# Altium PCB PCB_电机驱动板.pcbdoc
Units mil, origin at the board's own origin, x right, y up, seen from the top; angles counter-clockwise.
Board outline 6379.73 x 4315 mil, 2 copper layers (Top Layer, Bottom Layer); 62 components, 45 nets, 159 pads, 284 vias.
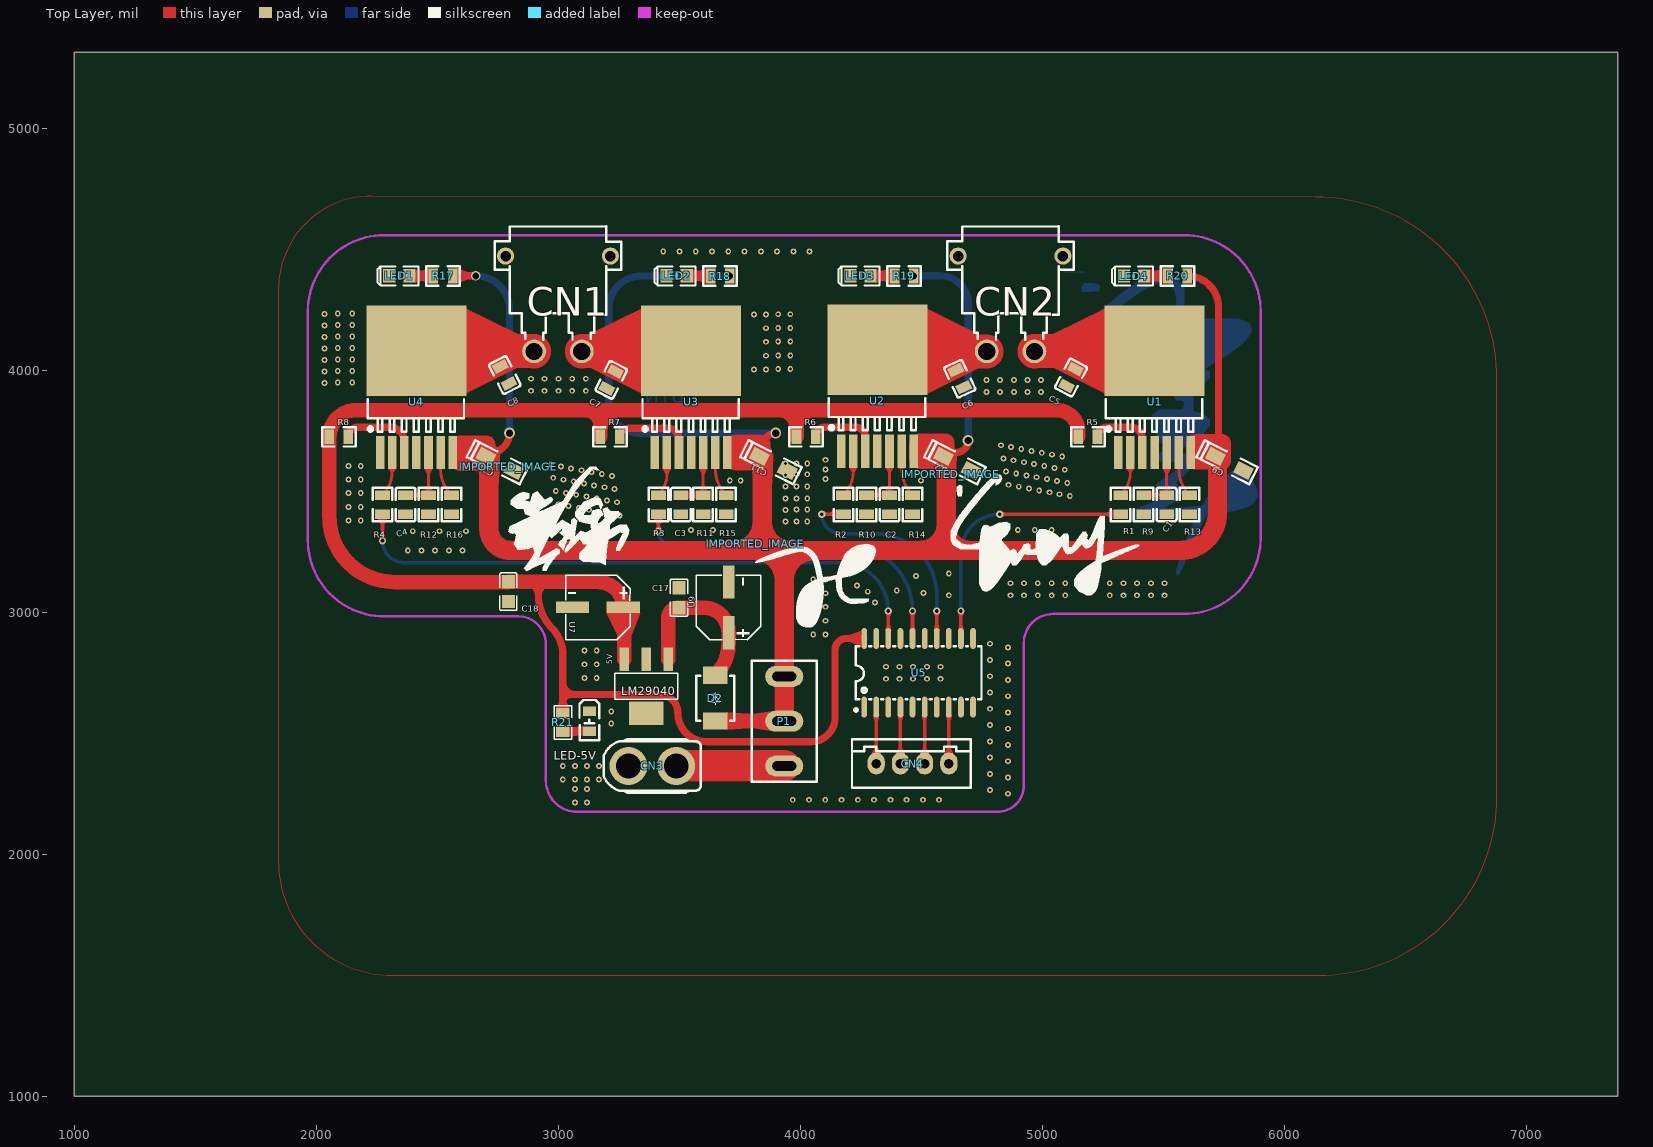
[diagram p0: Top Layer view]
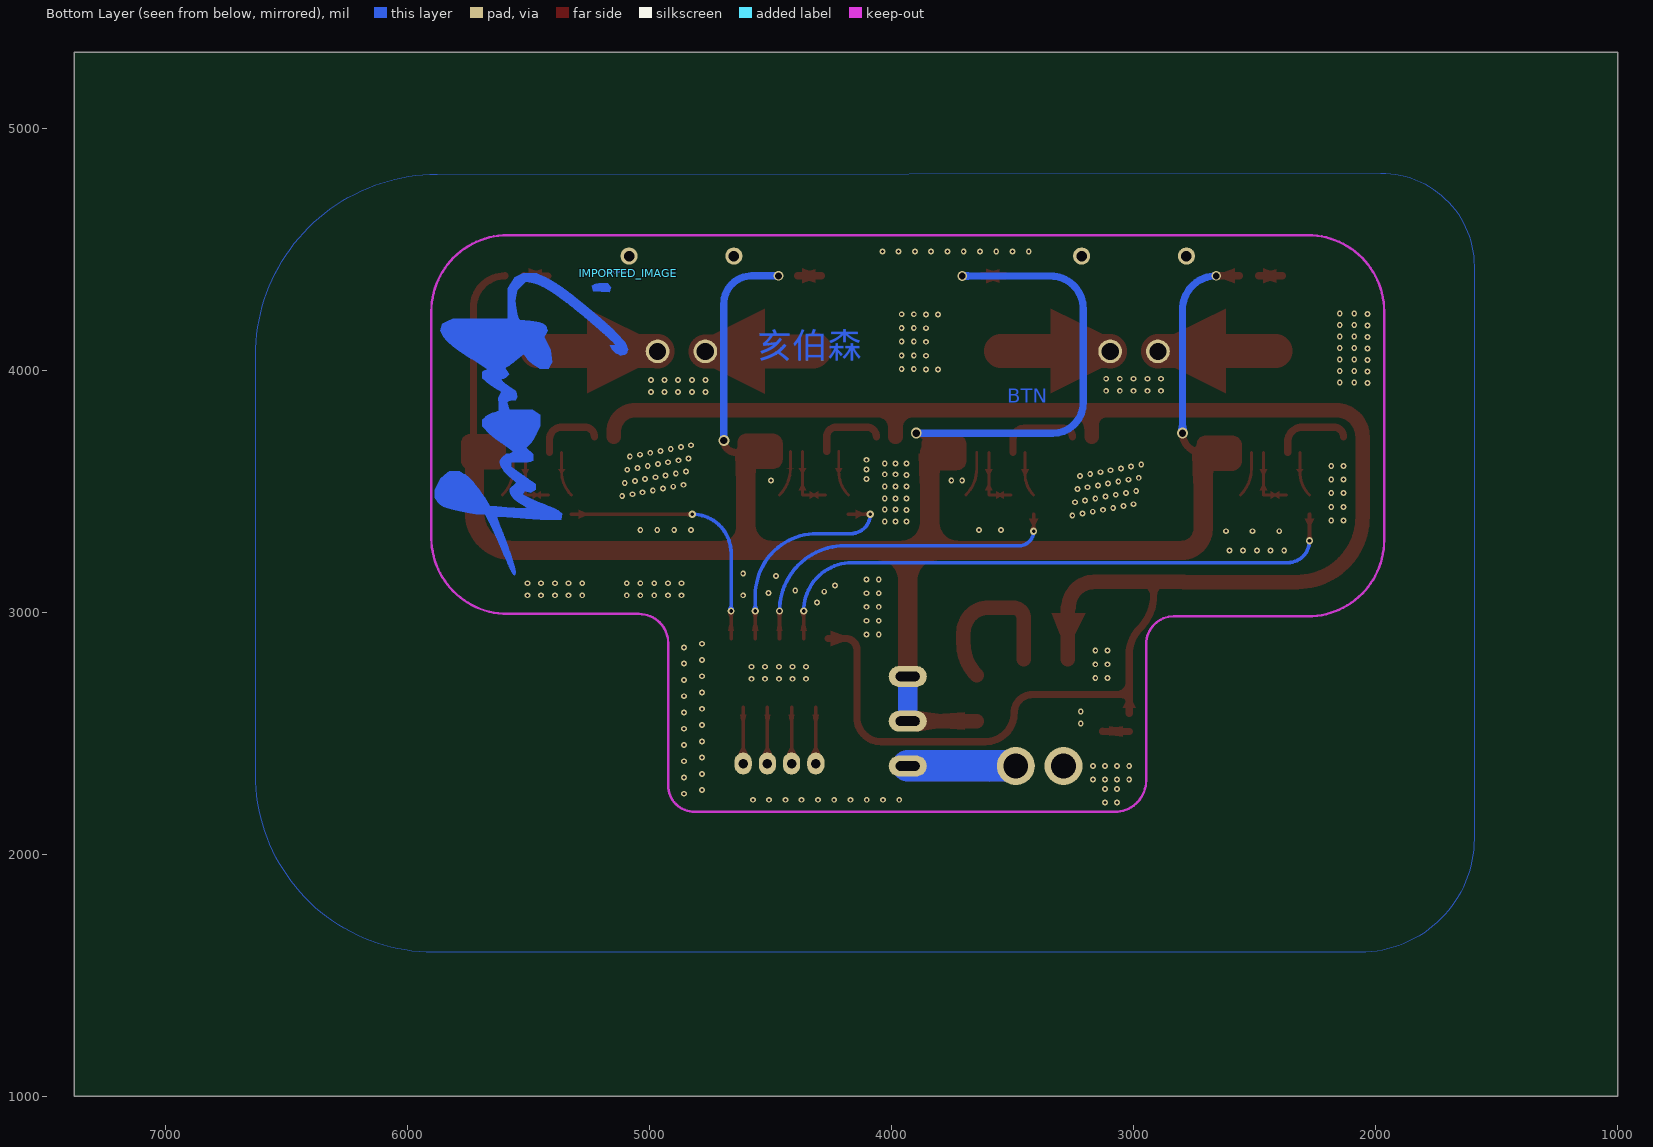
[diagram p1: Bottom Layer view, seen from below]

## Layer stack, top to bottom
Top Layer: signal copper (thickness not stored)
Dielectric: dielectric 12.6, FR-4, Dk 4.8
Bottom Layer: signal copper (thickness not stored)

## Board outline
7379.73,1000 1000,1000 1000,5315 7379.73,5315

## Components (designator, comment, footprint, x,y, rotation, side; value= is the part's Value field where it differs from the comment)
C1 "100PF" C0805#1 5514.73,3445 r90 top
C2 "100PF" C0805#1 4369.73,3445 r90 top
C3 "100PF" C0805#1 3507.42,3445 r90 top
C4 "100PF" C0805#1 2369.72,3445 r90 top
C5 "100PF" C0805#1 5119.73,3970 r62 top
C6 "100PF" C0805#1 4659.73,3965 r115 top
C7 "100PF" C0805#1 3219.72,3960 r63 top
C8 "100PF" C0805#1 2779.72,3980 r117 top
C9 "1u" CASE-A_3216 5774.73,3615 r153 top
C10 "1u" CASE-A_3216 2759.72,3615 r153 top
C11 "1u" CASE-A_3216 3889.72,3615 r153 top
C12 "1u" CASE-A_3216 4649.73,3615 r153 top
C17 "100uF" C0805#2 3499.72,3060 r270 top
C18 "100uF" C0805#2 2794.72,3085 r90 top
CN1 "XT30PW-M" CONN-TH_XT30PW-M 2999.72,4275 r180 top
CN2 "XT30PW-M" CONN-TH_XT30PW-M 4869.73,4275 r180 top
CN3 "Changzhou" CONN-TH_XT30UPB-F 3389.72,2365 r180 top
CN4 "XH2.54-4A" XH2.54-4A 4464.73,2375 r180 top
D2 "SS54" SMB_L4.6-W3.6-LS5.3-R-RD 3649.72,2645 r270 top
IMPORTED_IMAGE "IMPORTED_IMAGE" IMPORTED_IMAGE#1 4622.15,3570.84 r0 top
IMPORTED_IMAGE "IMPORTED_IMAGE" IMPORTED_IMAGE#1 3815.66,3282.69 r0 top
IMPORTED_IMAGE "IMPORTED_IMAGE" IMPORTED_IMAGE#1 2793.4,3601.25 r0 top
IMPORTED_IMAGE "IMPORTED_IMAGE" IMPORTED_IMAGE#2 5089.39,4401.13 r0 bottom
LED1 "LED-0805_G" LED0805_GREEN 2344.72,4390 r180 top
LED2 "LED-0805_G" LED0805_GREEN 3489.72,4390 r180 top
LED3 "LED-0805_G" LED0805_GREEN 4249.73,4390 r180 top
LED4 "LED-0805_G" LED0805_GREEN 5379.73,4389.21 r180 top
LED-5V "E6C0805UR" LED0805-R-RD 3129.72,2550 r270 top
LM29040 "LM2940IMP-5.0" SOT-223-4_L6.5-W3.5-P2.30-LS7.0-BR 3364.72,2695 r90 top
P1 "钮子开关" "钮子开关 MTS-102" 3934.72,2550 r270 top
R1 "1k" R0805#1 5324.73,3445 r90 top
R2 "1k" R0805#1 4179.73,3445 r90 top
R3 "1k" R0805#1 3414.72,3445 r90 top
R4 "1k" R0805#1 2274.72,3445 r90 top
R5 "1k" R0805#1 5189.73,3725 r0 top
R6 "1k" R0805#1 4024.72,3725 r0 top
R7 "1k" R0805#1 3214.72,3725 r0 top
R8 "1k" R0805#1 2094.72,3725 r0 top
R9 "1k" R0805#1 5419.73,3445 r90 top
R10 "1k" R0805#1 4274.73,3445 r90 top
R11 "1k" R0805#1 3599.72,3445 r90 top
R12 "1k" R0805#1 2464.72,3445 r90 top
R13 "1k" R0805#1 5609.73,3445 r90 top
R14 "1k" R0805#1 4464.73,3445 r90 top
R15 "1k" R0805#1 3694.72,3445 r90 top
R16 "1k" R0805#1 2559.72,3445 r90 top
R17 "330" R0805#1 2524.72,4390 r0 top
R18 "330" R0805#1 3669.72,4389.21 r0 top
R19 "330" R0805#1 4429.73,4390 r0 top
R20 "330" R0805#1 5559.73,4390 r0 top
R21 "4.7k" R0805#2 3019.72,2545 r270 top
U1 "BTN8962TAAUMA1" TO-263-7_L10.2-W10.4-P1.27-LS14.4-B 5464.73,3870 r270 top
U2 "BTN8962TAAUMA1" TO-263-7_L10.2-W10.4-P1.27-LS14.4-B 4319.73,3875 r270 top
U3 "BTN8962TAAUMA1" TO-263-7_L10.2-W10.4-P1.27-LS14.4-B 3549.72,3870 r270 top
U4 "BTN8962TAAUMA1" TO-263-7_L10.2-W10.4-P1.27-LS14.4-B 2414.72,3870 r270 top
U5 "SN74ALS244CNSR" SOIC-20_L13.3-W5.5-P1.27-LS7.8-BL 4489.73,2750 r0 top
U7 "220uf16V" CAP-SMD_BD6.3-L6.6-W6.6-LS7.6-FD 3164.72,3020 r180 top
U9 "100uf25V" CAP-SMD_BD6.3-L6.6-W6.6-LS7.6-FD 3704.72,3020 r90 top
? "" ? 2459.72,2942.45 r0 top
? "" ? 5414.73,3032.55 r0 top
? "" ? 6027.44,3772.5 r0 top
? "" ? 2720.86,3367.5 r0 top

## Footprints (in the part's own frame and the unit in brackets; to place one, negate y for a bottom-side part, rotate by r counter-clockwise, add the part's x,y. Pads: shape width x height; smd on the part's side, far side on the other; paste and mask are expansions set on the pad)
C0805#1 [mm]
  rect 1x1.55 smd paste+0 mask+0.102: 1(-1,0) 2(1,0)
  silkscreen extent -1.75,-1.04 1.75,1.04
C0805#2 [mm]
  rect 1.41x1.35 smd paste-100 mask+0.051: 1(-1.03,0) 2(1.03,0)
  silkscreen extent -1.96,-0.9 1.96,0.9
CAP-SMD_BD6.3-L6.6-W6.6-LS7.6-FD [mm]
  rect 3.5x1.2 smd paste+0 mask+0.051: 1(-2.67,0) 2(2.67,0)
  silkscreen extent -3.38,-3.38 3.38,3.38
CASE-A_3216 [mil]
  rect 71.5x53.5 smd paste+0 mask+2: 1(64.5,0) 2(-64.5,0)
  silkscreen extent -112,-39 135,40
CONN-TH_XT30PW-M [mm]
  round 2.5 hole 1.8 paste+0 mask+0.051: 1(-2.5,5) 2(2.5,5)
  round 1.8 hole 1.1 paste+0 mask+0.051: 3(5.5,-5) 4(-5.5,-5)
  silkscreen extent -6.65,-8.15 6.65,3.81
CONN-TH_XT30UPB-F [mm]
  round 4 hole 2.6 paste+0 mask+0.051: 1(-2.5,0) 2(2.5,0)
  silkscreen extent -5.1,-2.8 5.1,2.8
IMPORTED_IMAGE#1 [mil]
  silkscreen extent 0,-500 780,0
IMPORTED_IMAGE#2 [mil]
  Top Layer region: 1991 vertices and 7 holes, not listed, extent 0,0 799.66,1247.76
  Top Layer region: 77.13,78.21 73.55,68.88 69.97,59.55 84.71,41.79 109.35,41.88 109.99,41.89 110.63,41.89 111.26,41.9 111.9,41.92 112.54,41.93 113.83,41.98 115.11,42.03 116.38,42.1 117.66,42.18 118.93,42.27 120.18,42.37 121.43,42.48 122.66,42.61 123.88,42.74 125.08,42.88 126.26,43.03 127.42,43.19 128.56,43.36 129.67,43.53 130.76,43.72 131.81,43.91 132.83,44.11 133.82,44.32 134.77,44.53 135.68,44.75 136.55,44.97 137.38,45.2 138.17,45.44 138.91,45.68 139.6,45.92 140.24,46.17 140.82,46.43 141.1,46.56 141.35,46.68 141.6,46.81 141.83,46.94 142.04,47.07 150.09,52.18 145.82,74.63 111.48,76.42
LED0805-R-RD [mm]
  rect 1x1.4 smd paste+0 mask+0.051: 1(1.05,0) 2(-1.05,0)
  silkscreen extent -2.22,-1.04 1.99,1.01
LED0805_GREEN [mil]
  rect 51.2x55.1 smd paste+0 mask+2: 1(-41.35,0) 2(41.35,0)
  silkscreen extent -79,-39 91,39
R0805#1 [mm]
  rect 1x1.55 smd paste+0 mask+0.102: 1(-1,0) 2(1,0)
  silkscreen extent -1.75,-1.02 1.75,1.02
R0805#2 [mm]
  rect 1.133x1.377 smd paste-100 mask+0.051: 1(-0.966,0) 2(0.966,0)
  silkscreen extent -1.76,-0.92 1.76,0.92
SMB_L4.6-W3.6-LS5.3-R-RD [mm]
  rect 1.8x2.54 smd paste+0 mask+0.051: 1(2.4,0) 2(-2.4,0)
  silkscreen extent -2.35,-2 2.35,2
SOIC-20_L13.3-W5.5-P1.27-LS7.8-BL [mm]
  oval 0.6x2.2 smd paste+0 mask+0.051: 1(-5.715,-3.6) 2(-4.445,-3.6) 3(-3.175,-3.6) 4(-1.905,-3.6) 5(-0.635,-3.6) 6(0.635,-3.6) 7(1.905,-3.6) 8(3.175,-3.6) 9(4.445,-3.6) 10(5.715,-3.6) 11(5.715,3.6) 12(4.445,3.6) 13(3.175,3.6) 14(1.905,3.6) 15(0.635,3.6) 16(-0.635,3.6) 17(-1.905,3.6) 18(-3.175,3.6) 19(-4.445,3.6) 20(-5.715,3.6)
  silkscreen extent -6.72,-4.05 6.6,2.79
SOT-223-4_L6.5-W3.5-P2.30-LS7.0-BR [mm]
  rect 2.47x0.98 smd paste+0 mask+0.051: 1(2.835,-2.3) 2(2.835,0) 3(2.835,2.3)
  rect 2.47x3.6 smd paste+0 mask+0.051: 4(-2.835,0)
  silkscreen extent -1.37,-3.33 1.37,3.33
TO-263-7_L10.2-W10.4-P1.27-LS14.4-B [mm]
  rect 3.5x0.9 smd paste+0 mask+0.102: 1(5.334,-3.81) 2(5.334,-2.54) 3(5.334,-1.27) 4(5.334,0) 5(5.334,1.27) 6(5.334,2.54) 7(5.334,3.81)
  rect 9.5x10.5 smd paste+0 mask+0.102: 8(-5.334,0)
  silkscreen extent -0.27,-5.1 3.13,5
XH2.54-4A [mm]
  oval 1.8x2.3 hole 1 paste+0 mask+0.102: 1(3.81,0) 2(1.27,0) 3(-1.27,0) 4(-3.81,0)
  silkscreen extent -6.1,-2.54 6.35,2.54
"钮子开关 MTS-102" [mm]
  oval 2.2x4 hole 1 slot 2.5 at 90 deg paste+0 mask+0.102: 1(-4.7,0) 2(0,0) 3(4.7,0)
  silkscreen extent -6.35,-3.43 6.35,3.43
? [mil]

## Via types
v1: diameter 24.1, hole 12, Top Layer to Bottom Layer, tented both sides, 270 vias
v2: diameter 30, hole 15, Top Layer to Bottom Layer, tented both sides, 8 vias
v3: diameter 45, hole 30, Top Layer to Bottom Layer, tented both sides, 3 vias
v4: diameter 40, hole 28, Top Layer to Bottom Layer, tented both sides, 3 vias

## Nets (pads, with @x,y where several pads share a name; then routed paths per layer and width w, separated by ;. In a path a pad name is that pad's centre, name@x,y a point inside that pad or via, vN(x,y) a via of type N, cw(c..) or ccw(c..) an arc to the next point about the centre after c; other vN are vias at no path point)
5V: C18.2 LM29040.3 R5.1 R6.1 R7.1 R8.1 R21.1 U5.20 U7.1 | length 8397.2
  Top Layer w30: 2854.2,3125.55 2862.78,3125.55 cw(c2862.78,3069.18) 2919.14,3069.18 ; 2919.14,3125.55 2919.14,3069.18 ; 2994.72,3125.55 2975.51,3125.55 ccw(c2975.51,3069.18) 2919.14,3069.18 ; R21.1 3019.72,2630 ; 4191.43,2891.7 U5.20 ; 4191.45,2891.73 ccw(c4191.45,2845) 4144.73,2845 4144.73,2771.73 4144.73,2670 4144.73,2565 cw(c4044.72,2565) 4044.72,2465 3614.72,2465 cw(c3614.72,2585) 3494.72,2585 ccw(c3419.72,2585) 3419.72,2660 3069.72,2660 ; 2919.14,3069.18 ccw(c3108.91,3069.18) 2974.73,2935 cw(c2866.09,2826.36) 3019.72,2826.36 3019.72,2783.58 3019.72,2710 ; 3019.72,2630 3019.72,2710 ; 3019.72,2630 cw(c3049.72,2630) 3049.72,2660 3069.72,2660 ; 3019.72,2710 ccw(c3069.72,2710) 3069.72,2660
  Top Layer w60: 2055.32,3394.4 R8.1@2055.32,3725 ; 2055.36,3394.37 ccw(c2324.72,3394.37) 2324.72,3125 2794.22,3125 ccw(c2794.18,3125.55) C18.2 ; R8.1 cw(c2165.35,3725) 2165.35,3835 2304.72,3835 5059.73,3835 cw(c5059.73,3744.37) 5150.36,3744.37 R5.1 ; C18.2@2794.72,3125.5 3164.32,3125.5 ; 3113.25,3835 cw(c3113.25,3772.9) 3175.36,3772.9 ; 3164.3,3125.55 cw(c3164.3,3020) U7.1 cw(c3269.84,3015.67) U7.1@3274.17,3015.67 ; 3175.32,3755.8 3175.32,3725 3175.32,3772.9 ; 3175.36,3755.77 cw(c3254.58,3755.77) 3254.58,3835 ; LM29040.3 U7.1@3274.22,3015.7 ; 3914.58,3835 cw(c3914.58,3764.23) 3985.36,3764.23 ; 3985.32,3761.8 3985.32,3725 3985.32,3764.2 ; 3985.36,3761.77 cw(c4058.58,3761.77) 4058.58,3835
BAT1: CN3.1 P1.3 | length 893.1
  Top Layer w130: CN3.1 ccw(c3488.18,2365) CN3.1@3488.18,2364.96 ; CN3.1@3488.22,2365 P1.3
  Bottom Layer w130: CN3.1 ccw(c3488.18,2365) CN3.1@3488.18,2364.96 ; CN3.1@3488.22,2365 P1.3
C1_2: C1.2 R9.2 U1.5 | length 270.6
  Top Layer w12: R9.2 C1.2 U1.5
C2_2: C2.2 R10.2 U2.5 | length 275.6
  Top Layer w12: R10.2 C2.2 U2.5
C3_2: C3.2 R11.2 U3.5 | length 267.9
  Top Layer w12: C3.2 R11.2 U3.5
C4_2: C4.2 R12.2 U4.5 | length 270.6
  Top Layer w12: C4.2 R12.2 U4.5
GND: C1.1 C2.1 C3.1 C4.1 C5.1 C6.1 C7.1 C8.1 C9.2 C10.2 C11.2 C12.2 C17.1 C18.1 CN3.2 LED1.2 LED2.2 LED3.2 LED4.2 LED-5V.2 LM29040.2 LM29040.4 R9.1 R10.1 R11.1 R12.1 R13.1 R14.1 R15.1 R16.1 U1.1 U2.1 U3.1 U4.1 U5.1 U5.3 U5.5 U5.7 U5.9 U5.10 U5.11 U5.13 U5.15 U5.17 U5.19 U7.2 U9.2
  other v1: 3069.72,2213.75 3119.72,2213.75 3969.72,2225 4036.95,2225 4104.16,2225 4171.4,2225 4238.61,2225 4305.84,2225 4373.06,2225 4440.28,2225 4507.51,2225 4574.73,2225 4859.73,2250 4784.73,2265 3069.72,2270 3119.72,2270 3019.72,2308.75 3069.72,2308.75 3119.72,2308.75 3169.72,2308.75 4859.73,2317.22 4784.73,2332.22 3019.72,2365 3069.72,2365 3119.72,2365 3169.72,2365 4859.73,2384.44 4784.73,2399.44 4859.73,2451.67 4784.73,2466.67 4859.73,2518.89 4784.73,2533.89 3219.72,2540 4859.73,2586.11 3219.72,2590 4784.73,2601.11 4859.73,2653.33 4784.73,2668.33 4859.73,2720.56 4354.73,2725 4410.98,2725 4467.23,2725 4524.73,2725 4580.98,2725 3109.72,2728.75 3159.72,2728.75 4784.73,2735.56 4354.73,2775 4410.98,2775 4467.23,2775 4524.73,2775 4580.98,2775 3109.72,2785 3159.72,2785 4859.73,2787.78 4784.73,2802.78 3109.72,2842.5 3159.72,2842.5 4859.73,2855 4784.73,2870 4054.72,2908.75 4104.73,2908.75 4054.72,2965 4104.73,2965 4054.72,3022.5 4104.73,3022.5 4309.73,3040 4614.73,3070 4869.73,3070 4925.98,3070 4982.23,3070 5039.73,3070 5095.98,3070 5279.73,3070 5335.98,3070 5392.23,3070 5449.73,3070 5505.98,3070 4054.72,3078.75 4104.73,3078.75 4509.73,3080 4279.73,3085 4399.73,3090 4234.73,3110 4869.73,3120 4925.98,3120 4982.23,3120 5039.73,3120 5095.98,3120 5279.73,3120 5335.98,3120 5392.23,3120 5449.73,3120 5505.98,3120 4054.72,3135 4104.73,3135 4479.73,3150 4614.73,3160 2379.36,3255 2435.61,3255 2491.86,3255 2549.36,3255 2605.61,3255 2399.72,3335 2509.72,3335 2619.72,3335 3549.72,3340 3639.72,3340 4829.73,3340 4899.73,3340 4969.73,3340 5039.73,3340 3939.72,3375 3984.72,3375 4029.72,3375 2134.72,3378.75 2184.72,3378.75 3254.72,3400 3212.51,3407.78 3170.28,3415.56 3939.72,3422.5 3128.05,3423.33 3984.72,3425 4029.72,3425 3085.84,3431.11 2134.72,3435 2184.72,3435 3043.61,3438.89 3001.39,3446.67 3244.16,3454.44 3201.95,3462.22 3159.72,3470 3939.72,3470 3984.72,3470 4029.72,3470 3117.51,3477.78 5114.73,3480.01 3075.28,3485.56 5072.51,3487.79 2134.72,3492.5 2184.72,3492.5 3033.05,3493.33 5030.28,3495.57 2990.84,3501.11 4988.06,3503.34 3233.61,3508.89 4945.84,3511.12 3191.39,3516.67 4903.61,3518.9 3939.72,3520 3984.72,3520 4029.72,3520 3149.16,3524.44 4861.4,3526.68 3106.95,3532.22 5104.16,3534.45 3064.72,3540 5061.94,3542.23 3709.72,3545 3754.72,3545 4499.73,3545 3022.51,3547.78 2134.72,3548.75 2184.72,3548.75 4104.73,3550 5019.73,3550.01 2980.28,3555.56 4977.51,3557.79 3223.05,3563.33 4935.28,3565.57 3939.72,3567.5 3984.72,3570 4029.72,3570 3180.84,3571.11 4893.06,3573.34 3138.61,3578.89 4850.84,3581.12 3096.39,3586.67 5093.61,3588.9 4104.73,3590 3054.16,3594.44 5051.4,3596.68 3011.95,3602.22 5009.16,3604.45 2134.72,3605 2184.72,3605 2969.72,3610 4966.94,3612.23 3939.72,3615 3984.72,3615 4029.72,3615 4924.73,3620.01 4882.51,3627.79 4104.73,3630 4840.28,3635.57 5083.06,3643.34 5040.84,3651.12 4998.61,3658.9 4956.4,3666.68 4914.16,3674.45 4871.94,3682.23 4829.73,3690.01 4769.73,3910 4825.98,3910 4883.48,3910 4939.73,3910 4995.98,3910 2888.47,3915 2944.72,3915 3002.22,3915 3058.47,3915 3114.72,3915 2034.72,3947.5 2089.72,3950 2149.72,3950 4769.73,3960 4825.98,3960 4883.48,3960 4939.73,3960 4995.98,3960 2888.47,3965 2944.72,3965 3002.22,3965 3058.47,3965 3114.72,3965 2034.72,3995 2089.72,3997.5 2149.72,3997.5 3809.72,4003.75 3859.72,4003.75 3909.72,4005 3959.72,4005 2034.72,4042.5 2089.72,4045 2149.72,4045 3859.72,4060 3909.72,4061.25 3959.72,4061.25 2034.72,4090 2089.72,4092.5 2149.72,4092.5 3859.72,4117.5 3909.72,4118.75 3959.72,4118.75 2034.72,4137.5 2089.72,4140 2149.72,4140 3859.72,4173.75 3909.72,4175 3959.72,4175 2034.72,4185 2089.72,4187.5 2149.72,4187.5 3809.72,4230 3859.72,4230 3909.72,4231.25 3959.72,4231.25 2034.72,4232.5 2089.72,4235 2149.72,4235 3434.72,4490 3501.95,4490 3569.16,4490 3636.39,4490 3703.61,4490 3770.84,4490 3838.05,4490 3905.28,4490 3972.51,4490 4039.72,4490
M1A: C5.2 CN2.1 U1.8 | length 497.6
  Top Layer w140: CN2.1@4968.14,4078.15 cw(c4969.99,4078.15) 4969.99,4080 U1.8
M1B: C6.2 CN2.2 U2.8 | length 455.5
  Top Layer w140: U2.8 ccw(c4326.57,4085) U2.8@4326.57,4078.15 ; U2.8@4326.62,4078.1 CN2.2@4771.32,4078.1
M2A: C7.2 CN1.1 U3.8 | length 452.6
  Top Layer w140: CN1.1@3098.14,4078.15 cw(c3099.99,4078.15) 3099.99,4080 U3.8
M2B: C8.2 CN1.2 U4.8 | length 487.6
  Top Layer w140: U4.8 CN1.2@2899.43,4080 ; CN1.2@2899.44,4080 cw(c2899.44,4078.15) CN1.2
PWMIN1: CN4.1 U5.2 | length 233.3
  Top Layer w15: CN4.1 U5.2
PWMIN2: CN4.2 U5.4 | length 233.3
  Top Layer w15: CN4.2 U5.4
PWMIN3: CN4.3 U5.6 | length 233.3
  Top Layer w15: CN4.3 U5.6
PWMIN4: CN4.4 U5.8 | length 233.3
  Top Layer w15: CN4.4 U5.8
PWMOUT1: R4.1 U5.18 | length 2479.4
  Top Layer w15: v2(2274.72,3295) R4.1 ; U5.18 v2(4364.73,3005)
  Bottom Layer w15: v2(2274.72,3295) ccw(c2364.72,3295) 2364.72,3205 2379.35,3205 2435.6,3205 2491.85,3205 2549.35,3205 2605.6,3205 3569.72,3205 4164.73,3205 cw(c4164.73,3005) v2(4364.73,3005)
PWMOUT2: R3.1 U5.16 | length 1422.3
  Top Layer w15: v2(3414.72,3335) R3.1 ; U5.16 v2(4464.73,3005)
  Bottom Layer w15: v2(3414.72,3335) ccw(c3474.72,3335) 3474.72,3275 3744.72,3275 4194.73,3275 cw(c4194.73,3005) v2(4464.73,3005)
PWMOUT3: R2.1 U5.14 | length 934.9
  Top Layer w15: v2(4089.72,3405) cw(c4090.36,3405) v2@4090.36,3405.63 ; v2@4090.32,3405.6 R2.1 ; U5.14 v2(4564.73,3005)
  Bottom Layer w15: v2(4089.72,3405) ccw(c4169.73,3405) 4169.73,3325 4309.73,3325 cw(c4309.73,3070) 4564.73,3070 v2(4564.73,3005)
PWMOUT4: R1.1 U5.12 | length 1105
  Top Layer w15: U5.12 v2(4664.73,3005) ; v2(4824.73,3405) 5324.12,3405 ccw(c5324.09,3405.63) R1.1
  Bottom Layer w15: v2(4664.73,3005) 4664.73,3245 cw(c4824.73,3245) v2(4824.73,3405)
R1_2: R1.2 U1.2 | length 186.4
  Top Layer w12: R1.2 ccw(c5228.15,3580.95) 5364.72,3580.95 ; 5364.73,3580.9 U1.2
R2_2: R2.2 U2.2 | length 191.4
  Top Layer w12: R2.2 ccw(c4083.14,3580.95) 4219.73,3580.95 ; 4219.73,3580.9 U2.2
R3_2: R3.2 U3.2 | length 185
  Top Layer w12: R3.2 ccw(c3330.22,3568.87) 3449.72,3568.87 ; 3449.72,3568.9 U3.2
R4_2: R4.2 U4.2 | length 186.4
  Top Layer w12: R4.2 ccw(c2178.17,3580.93) 2314.73,3580.93 ; 2314.72,3580.9 U4.2
R5_2: R5.2 U1.3 | length 292
  Top Layer w30: R5.2 cw(c5269.09,3725) 5269.09,3765 5364.73,3765 cw(c5364.73,3715) 5414.73,3715 U1.3
R6_2: R6.2 U2.3 | length 311.3
  Top Layer w30: R6.2 cw(c4104.09,3725) 4104.09,3765 4229.73,3765 cw(c4229.73,3725) 4269.73,3725 U2.3
R7_2: R7.2 U3.3 | length 346.3
  Top Layer w30: R7.2 cw(c3289.1,3725) 3289.1,3760 3454.72,3760 cw(c3454.72,3715) 3499.72,3715 U3.3
R8_2: R8.2 U4.3 | length 332.7
  Top Layer w30: R8.2 cw(c2174.09,3725) 2174.09,3765 2304.72,3765 cw(c2304.72,3705) 2364.73,3705 U4.3
R13_2: R13.2 U1.6 | length 187.7
  Top Layer w12: U1.6@5564.73,3593 U1.6 ; U1.6@5564.73,3593 ccw(c5718.35,3593) R13.2
R14_2: R14.2 U2.6 | length 192.7
  Top Layer w12: 4419.73,3593 U2.6 ; 4419.73,3593.02 ccw(c4573.38,3593.02) R14.2
R15_2: R15.2 U3.6 | length 187.7
  Top Layer w12: U3.6 3649.72,3593.02 ccw(c3803.38,3593.02) R15.2
R16_2: R16.2 U4.6 | length 187.7
  Top Layer w12: U4.6 2514.73,3593.01 ccw(c2668.37,3593.01) R16.2
R17_1: LED1.1 R17.1 | length 99.2
  Top Layer w30: LED1.1 R17.1@2485.32,4390
R18_1: LED2.1 R18.1 | length 99.6
  Top Layer w30: LED2.1 R18.1@3629.53,4390 ; R18.1@3629.57,4390 cw(c3629.57,4389.22) R18.1
R19_1: LED3.1 R19.1 | length 99.2
  Top Layer w30: LED3.1 R19.1@4390.32,4390
R20_1: LED4.1 R20.1 | length 99.7
  Top Layer w30: LED4.1@5421.02,4389.2 R20.1@5519.52,4389.2 ; R20.1@5519.56,4389.21 ccw(c5519.56,4390) R20.1
R21_2: LED-5V.1 R21.2 | length 111
  Top Layer w30: R21.2 LED-5V.1@3128.03,2507 ; LED-5V.1@3128.03,2506.96 ccw(c3128.03,2508.65) LED-5V.1
S$6256: 
S$6266: 
S$6632: 
S$6639: 
S$6652: 
S$6665: 
S$6669: 
U6_1: C17.2 D2.2 LM29040.1 U9.1 | length 693
  Top Layer w60: LM29040.1@3455.22,2806.6 3455.22,2975 ; 3455.28,2975 cw(c3499.72,2975) C17.2 ; C17.2@3499.72,3019.5 3600.12,3019.5 ; 3600.16,3019.45 cw(c3600.16,2914.88) U9.1 3704.72,2872.27 cw(c3516.94,2872.27) D2.2
VCC: C9.1 C10.1 C11.1 C12.1 D2.1 P1.1 P1.2 R17.2 R18.2 R19.2 R20.2 U1.7 U2.7 U3.7 U4.7 | length 11024.8
  Top Layer w30: R17.2 v4(2659.72,4390) ; C10.1@2714.12,3660.61 2720.33,3660.61 ccw(c2720.33,3740) v3(2799.72,3740) ; C11.1@3844.12,3660.61 3844.12,3684.39 cw(c3899.72,3684.39) v3(3899.72,3740) ; C12.1@4604.12,3660.6 4645.32,3660.6 ; 4645.34,3660.61 ccw(c4645.34,3710) v3(4694.73,3710) ; R20.2 cw(c5599.09,4259.98) 5729.12,4259.98 C9.1@5729.12,3660.6
  Top Layer w60: D2.1 ccw(c3650.96,2551.74) D2.1@3650.96,2550 ; D2.1@3650.93,2550 P1.2
  Top Layer w80: C10.1@2714.12,3660.6 2714.12,3345.6 ccw(c2804.72,3345.61) 2804.72,3255 3724.72,3255 ; 3811.36,3255 cw(c3811.36,3131.64) 3934.72,3131.64 ; C11.1@3844.12,3660.6 3844.12,3374.4 ; P1.2 P1.1 3934.72,3045 3934.72,3131.64 ; 3963.51,3255 cw(c3963.51,3374.39) 3844.12,3374.39 ; 4058.07,3255 ccw(c4058.07,3131.64) 3934.72,3131.64 ; 4495.23,3255 ccw(c4495.23,3363.89) 4604.11,3363.89 ; C12.1@4604.12,3660.6 4604.12,3363.9 ; 4700.56,3255 cw(c4700.56,3351.44) 4604.11,3351.44 4604.11,3363.89 ; C9.1@5729.11,3660.61 ccw(c5729.11,3656.22) 5724.72,3656.22 5724.73,3410 cw(c5569.73,3410) 5569.73,3255 3724.72,3255 ; 3724.72,3255 ccw(c3724.72,3374.39) 3844.12,3374.39
  Bottom Layer w30: v4(2659.72,4390) cw(c2659.72,4250) 2799.72,4250 v3(2799.72,3740) ; 3209.72,4255 3209.72,3865 ccw(c3334.72,3865) 3334.72,3740 v3(3899.72,3740) ; 3209.73,4255 cw(c3343.94,4255) 3343.94,4389.22 v4(3709.09,4389.22) ; v4(4469.1,4390) 4579.72,4390 cw(c4579.73,4275) 4694.73,4275 v3(4694.73,3710)
  Bottom Layer w80: P1.2 P1.1
pads on no net: CN1.3 CN1.4 CN2.3 CN2.4 U1.4 U2.4 U3.4 U4.4

## Polygon pours and split planes (outlines as drawn)
GND on Top Layer (solid): 2229.72,4720 ccw(c2229.72,4335) 1844.72,4335 1844.72,1970 ccw(c2314.72,1970) 2314.72,1500 6144.73,1500 ccw(c6144.73,2235) 6879.73,2235 6879.73,2715 6879.73,3965 ccw(c6129.73,3965) 6129.73,4715
GND on Bottom Layer (solid): 1979.72,4815 ccw(c1979.72,4430) 1594.72,4430 1594.72,2065 ccw(c2064.72,2065) 2064.72,1595 5894.73,1595 ccw(c5894.73,2330) 6629.73,2330 6629.73,2810 6629.73,4060 ccw(c5879.73,4060) 5879.73,4810

## Keep-outs
Keep-Out Layer:
  lines w10: 1966.22,3298.15 ccw(c2281.18,3298.15) 2281.18,2983.19 ; 1966.22,4243.03 cw(c2281.18,4243.03) 2281.18,4557.99 ; 5588.27,2993.19 ccw(c5588.27,3308.15) 5903.23,3308.15 ; 5588.27,4557.99 cw(c5588.27,4243.03) 5903.23,4243.03
  lines w10 net S$6256: 2835.01,2983.19 cw(c2835.01,2868.48) 2949.73,2868.48
  lines w10 net S$6652: 4924.73,2872.87 cw(c5045.04,2872.87) 5045.04,2993.19
  lines w10 net S$6665: 4814.73,2175 ccw(c4814.73,2285) 4924.73,2285
  lines w10 net S$6669: 2949.72,2305 ccw(c3079.72,2305) 3079.72,2175

## Other copper
Top Layer:
  region net VCC: 3732.22,3732.5 ccw(c3732.22,3692.5) 3692.22,3692.5 3692.22,3682.5 3692.22,3627.5 ccw(c3732.22,3627.5) 3732.22,3587.5 3842.22,3587.5 ccw(c3842.22,3622.5) 3877.22,3622.5 3877.22,3697.5 ccw(c3842.22,3697.5) 3842.22,3732.5
  region net VCC: 4492.23,3737.5 ccw(c4492.23,3697.5) 4452.23,3697.5 4452.23,3687.5 4452.23,3632.5 ccw(c4492.23,3632.5) 4492.23,3592.5 4602.23,3592.5 ccw(c4602.23,3627.5) 4637.23,3627.5 4637.23,3702.5 ccw(c4602.23,3702.5) 4602.23,3737.5
  region net VCC: 5634.73,3735 ccw(c5634.73,3695) 5594.73,3695 5594.73,3685 5594.73,3630 ccw(c5634.73,3630) 5634.73,3590 5744.73,3590 ccw(c5744.73,3625) 5779.73,3625 5779.73,3700 ccw(c5744.73,3700) 5744.73,3735
  region net VCC: 2594.72,3730 ccw(c2594.72,3690) 2554.72,3690 2554.72,3680 2554.72,3625 ccw(c2594.72,3625) 2594.72,3585 2704.72,3585 ccw(c2704.72,3620) 2739.72,3620 2739.72,3695 ccw(c2704.72,3695) 2704.72,3730
  region net BAT1: 3540.25,2424.04 3540.21,2305.93 3595.32,2299.96 3595.37,2429.96
  region net PWMOUT1: 4375.98,2995.08 4353.48,2995.08 4357.23,2984.58 4372.23,2984.58
  region net PWMOUT1: 2285.97,3304.92 2263.47,3304.92 2267.22,3315.42 2282.22,3315.42
  region net PWMOUT2: 4475.98,2995.08 4453.48,2995.08 4457.23,2984.58 4472.23,2984.58
  region net PWMOUT2: 3425.97,3344.92 3403.47,3344.92 3407.22,3355.42 3422.22,3355.42
  region net PWMOUT3: 4099.99,3394.06 4099.29,3416.55 4109.91,3413.13 4110.37,3398.13
  region net PWMOUT3: 4575.98,2995.08 4553.48,2995.08 4557.23,2984.58 4572.23,2984.58
  region net PWMOUT4: 4675.98,2995.08 4653.48,2995.08 4657.23,2984.58 4672.23,2984.58
  region net PWMOUT4: 4834.65,3393.75 4834.65,3416.25 4845.15,3412.5 4845.15,3397.5
  region net VCC: 2646.5,4375 2646.5,4405 2632.5,4405 2632.5,4375
  region net C1_2: 5499.73,3504.06 5529.73,3504.06 5520.73,3522.06 5508.73,3522.06
  region net C1_2: 5484.21,3469.37 5484.21,3499.37 5466.21,3490.37 5466.21,3478.37
  region net C2_2: 4354.73,3504.06 4384.73,3504.06 4375.73,3522.06 4363.73,3522.06
  region net C2_2: 4339.21,3469.37 4339.21,3499.37 4321.21,3490.37 4321.21,3478.37
  region net C3_2: 3537.93,3499.37 3537.93,3469.37 3555.93,3478.37 3555.93,3490.37
  region net C4_2: 2400.24,3499.37 2400.24,3469.37 2418.24,3478.37 2418.24,3490.37
  region net VCC: 5702.87,3684.92 5771.92,3655.63 5744.11,3716.31 5714.11,3729.04
  region net VCC: 2758.31,3654.24 2669.92,3666.97 2674.12,3545.13 2754.12,3533.61
  region net VCC: 3888.31,3654.24 3799.92,3666.97 3804.12,3545.13 3884.12,3533.61
  region net VCC: 4648.31,3654.24 4559.92,3666.97 4564.11,3545.13 4644.11,3533.61
  region net VCC: 4599.14,3703.42 4628.45,3634.38 4645.34,3645.61 4638.97,3675.61
  region net VCC: 3699.72,2585.94 3699.72,2515.08 3789.72,2520 3789.72,2580
  region net R21_2: 3102.18,2488.96 3102.18,2528.34 3057.18,2521.96 3057.18,2491.96
  region net PWMOUT4: 5294.21,3386.25 5294.21,3423.75 5271.71,3412.5 5271.71,3397.5
  region net PWMOUT3: 4149.21,3386.88 4149.21,3424.38 4126.71,3413.13 4126.71,3398.13
  region net PWMOUT2: 3433.47,3385.94 3395.97,3385.94 3407.22,3363.44 3422.22,3363.44
  region net PWMOUT1: 2293.47,3385.94 2255.97,3385.94 2267.22,3363.44 2282.22,3363.44
  region net C1_2: 5450.24,3499.37 5450.24,3469.37 5468.24,3478.37 5468.24,3490.37
  region net C2_2: 4305.24,3499.37 4305.24,3469.37 4323.24,3478.37 4323.24,3490.37
  region net C3_2: 3584.72,3504.06 3614.72,3504.06 3605.72,3522.06 3593.72,3522.06
  region net C3_2: 3569.21,3469.37 3569.21,3499.37 3551.21,3490.37 3551.21,3478.37
  region net C4_2: 2449.73,3504.06 2479.73,3504.06 2470.73,3522.06 2458.73,3522.06
  region net C4_2: 2434.21,3469.37 2434.21,3499.37 2416.21,3490.37 2416.21,3478.37
  region net VCC: 2583.78,4420.51 2583.78,4359.49 2628.78,4375 2628.78,4405
  region net R17_1: 2465.67,4359.49 2465.67,4420.51 2420.67,4405 2420.67,4375
  region net R18_1: 3610.67,4358.7 3610.67,4419.73 3565.67,4405 3565.67,4375
  region net R19_1: 4370.67,4359.49 4370.67,4420.51 4325.67,4405 4325.67,4375
  region net R20_1: 5500.67,4359.49 5500.67,4420.51 5455.67,4404.21 5455.67,4374.21
  region net R21_2: 3046.83,2529.25 3046.83,2484.66 3091.83,2491.96 3091.83,2521.96
  region net 5V: 3046.83,2605.34 2992.62,2605.34 3004.72,2630 3034.72,2630
  region net M1A: 5258.04,3905 5258.04,4255 5048.04,4150 5048.04,4010
  region net C1_2: 5529.73,3591.1 5499.73,3591.1 5508.73,3573.1 5520.73,3573.1
  region net R1_2: 5379.73,3591.1 5349.73,3591.1 5358.73,3580.94 5370.73,3580.94
  region net M1B: 4526.41,4253.15 4526.41,3903.15 4736.41,4008.15 4736.41,4148.15
  region net R14_2: 4434.73,3596.1 4404.73,3596.1 4413.73,3593.02 4425.73,3593.02
  region net C2_2: 4384.73,3596.1 4354.73,3596.1 4363.73,3578.1 4375.73,3578.1
  region net R2_2: 4234.73,3596.1 4204.73,3596.1 4213.73,3580.95 4225.73,3580.95
  region net M2A: 3343.04,3905 3343.04,4255 3133.04,4150 3133.04,4010
  region net C3_2: 3614.72,3591.1 3584.72,3591.1 3593.72,3573.1 3605.72,3573.1
  region net R3_2: 3464.72,3591.1 3434.72,3591.1 3443.72,3573.1 3455.72,3573.1
  region net M2B: 2621.41,4255 2621.41,3905 2831.41,4010 2831.41,4150
  region net C4_2: 2479.73,3591.1 2449.73,3591.1 2458.73,3573.1 2470.73,3573.1
  region net R4_2: 2329.73,3591.1 2299.73,3591.1 2308.73,3580.93 2320.73,3580.93
  region net 5V: 3338.74,2996.38 3200.95,2996.38 3244.18,2906.38 3304.18,2906.38
  region net R17_1: 2411.68,4417.55 2411.68,4362.45 2456.68,4375 2456.68,4405
  region net R18_1: 3556.68,4417.55 3556.68,4362.45 3601.68,4375 3601.68,4405
  region net R19_1: 4316.68,4417.55 4316.68,4362.45 4361.68,4375 4361.68,4405
  region net R20_1: 5446.67,4416.77 5446.67,4361.66 5491.67,4374.21 5491.67,4404.21
  region net PWMIN1: 4333.48,2414.91 4295.98,2414.91 4307.23,2437.41 4322.23,2437.41
  region net PWMIN2: 4433.48,2414.91 4395.98,2414.91 4407.23,2437.41 4422.23,2437.41
  region net PWMIN3: 4533.48,2414.91 4495.98,2414.91 4507.23,2437.41 4522.23,2437.41
  region net PWMIN4: 4633.48,2414.91 4595.98,2414.91 4607.23,2437.41 4622.23,2437.41
  region net VCC: 3899.29,2778.35 3970.15,2778.35 3974.72,2898.35 3894.72,2898.35
  region net VCC: 3970.15,2691.73 3899.29,2691.73 3894.72,2571.73 3974.72,2571.73
  region net VCC: 3899.29,2506.69 3899.29,2593.31 3809.29,2580 3809.29,2520
  region net VCC: 3899.29,2593.31 3970.15,2593.31 3974.72,2713.31 3894.72,2713.31
  region net 5V: 4252.91,2860.23 4252.91,2923.23 4207.91,2906.73 4207.91,2876.73
  region net PWMOUT1: 4376.54,2923.23 4352.91,2923.23 4357.23,2945.73 4372.23,2945.73
  region net PWMOUT2: 4476.54,2923.23 4452.91,2923.23 4457.23,2945.73 4472.23,2945.73
  region net PWMOUT3: 4576.54,2923.23 4552.91,2923.23 4557.23,2945.73 4572.23,2945.73
  region net PWMIN4: 4626.54,2576.77 4602.91,2576.77 4607.23,2554.27 4622.23,2554.27
  region net PWMIN3: 4526.54,2576.77 4502.91,2576.77 4507.23,2554.27 4522.23,2554.27
  region net PWMIN2: 4426.54,2576.77 4402.91,2576.77 4407.23,2554.27 4422.23,2554.27
  region net PWMIN1: 4326.54,2576.77 4302.91,2576.77 4307.23,2554.27 4322.23,2554.27
  region net PWMOUT4: 4676.54,2923.23 4652.91,2923.23 4657.23,2945.73 4672.23,2945.73
Bottom Layer:
  region net BAT1: 3540.25,2424.04 3540.21,2305.93 3595.32,2299.96 3595.37,2429.96
  region net PWMOUT3: 4575.98,3014.92 4553.48,3014.92 4557.23,3025.42 4572.23,3025.42
  region net PWMOUT4: 4675.98,3014.92 4653.48,3014.92 4657.23,3025.42 4672.23,3025.42
  region net VCC: 2816.6,3754.88 2782.85,3754.88 2784.72,3770.63 2814.72,3770.63
  region net VCC: 3695.86,4374.22 3695.86,4404.22 3681.86,4404.22 3681.86,4374.22
  region net VCC: 4482.33,4375 4482.33,4405 4496.33,4405 4496.33,4375
  region net VCC: 3970.15,2691.73 3899.29,2691.73 3894.72,2571.73 3974.72,2571.73
  region net VCC: 3899.29,2593.31 3970.15,2593.31 3974.72,2713.31 3894.72,2713.31
  text "亥伯森" at 4555.65,4016.3 h180
  text "BTN" at 3522.86,3845.59 h100

## Silkscreen, mask and mechanical layers (free items; w line width, h text height)
Top Overlay:
  text "5V" at 3231.51,2785.71 h40 r90